# Altium PCB Digital-input.PcbDoc
Units mil, origin at the board's own origin, x right, y up, seen from the top; angles counter-clockwise.
Board outline 2505.03 x 3131.03 mil, 2 copper layers (Top Layer, Bottom Layer); 51 components, 56 nets, 194 pads, 20 vias.
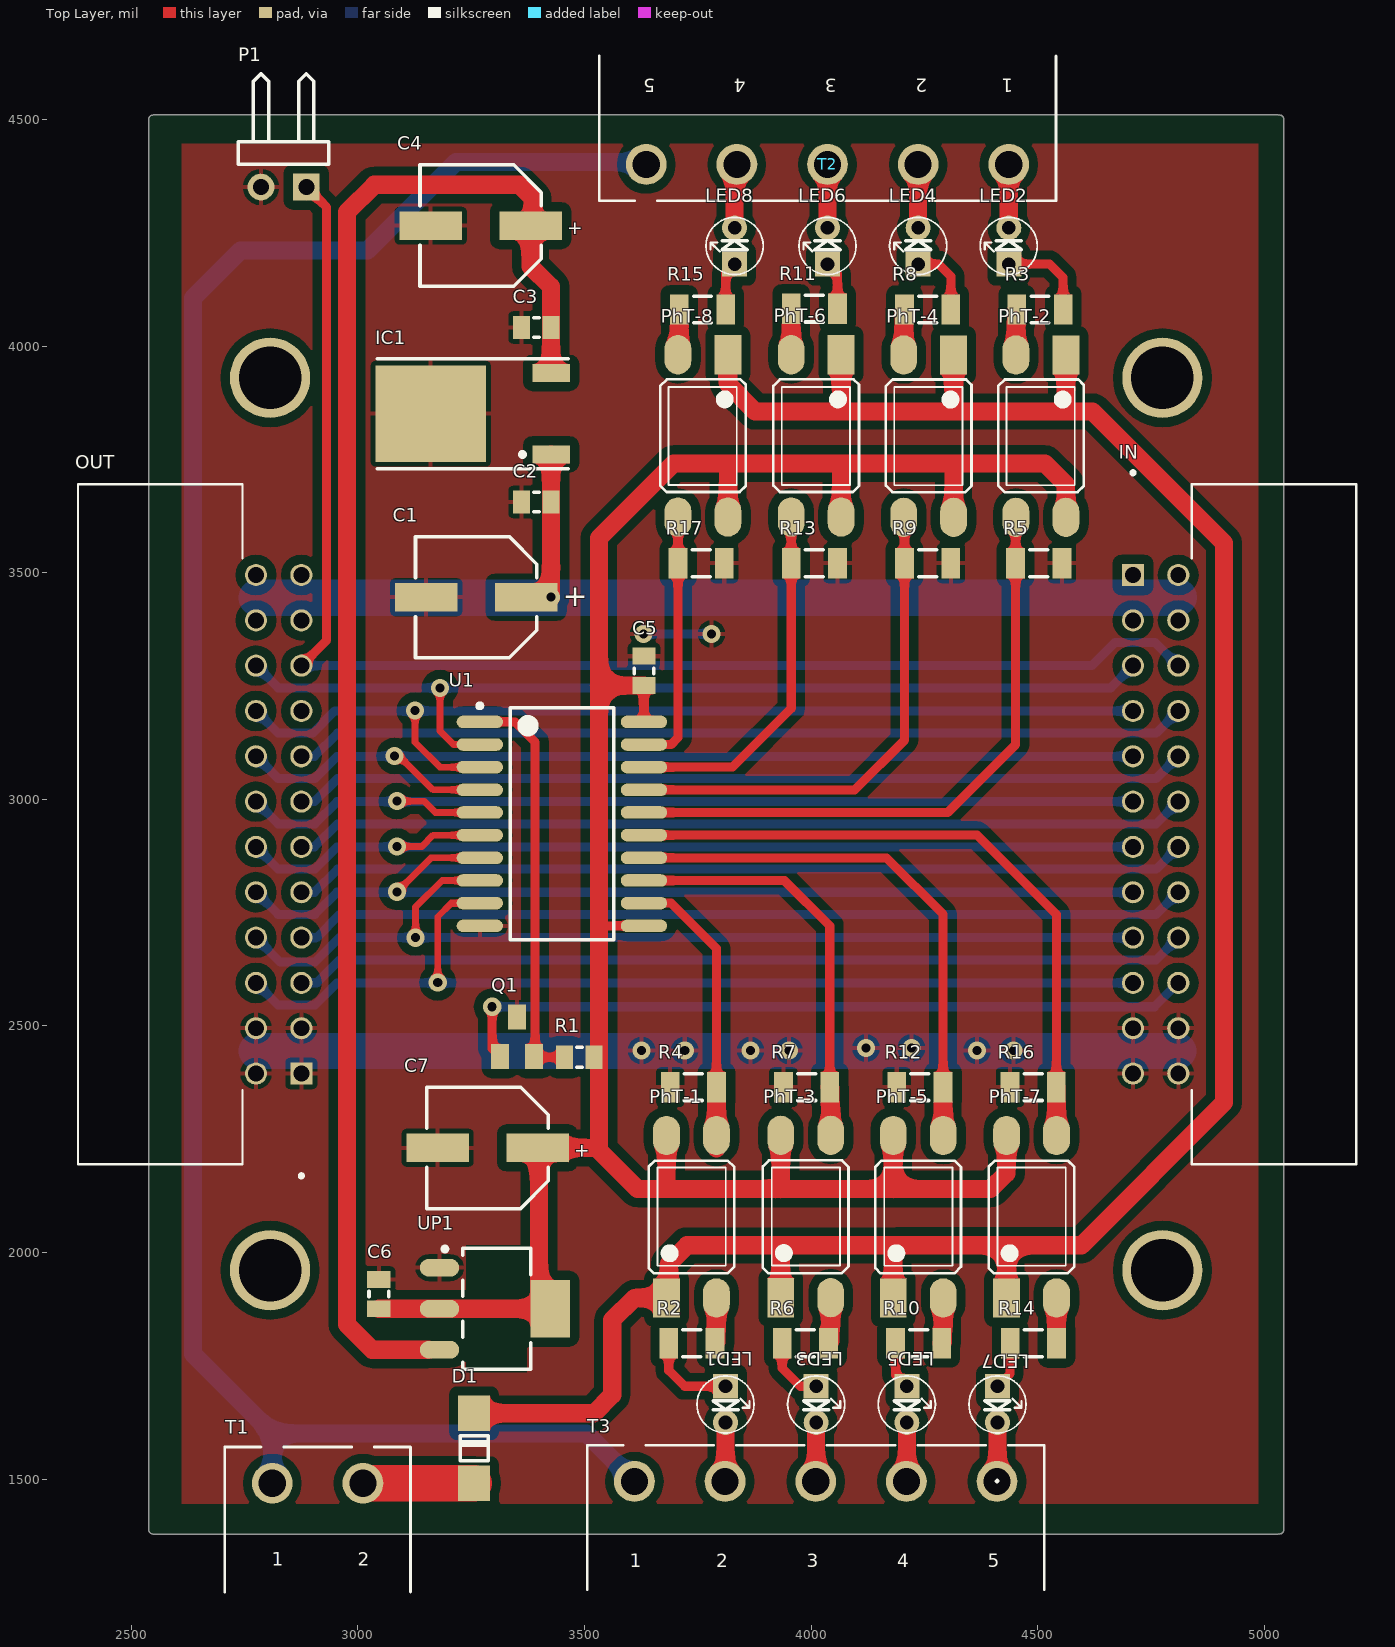
[diagram p0: Top Layer view]
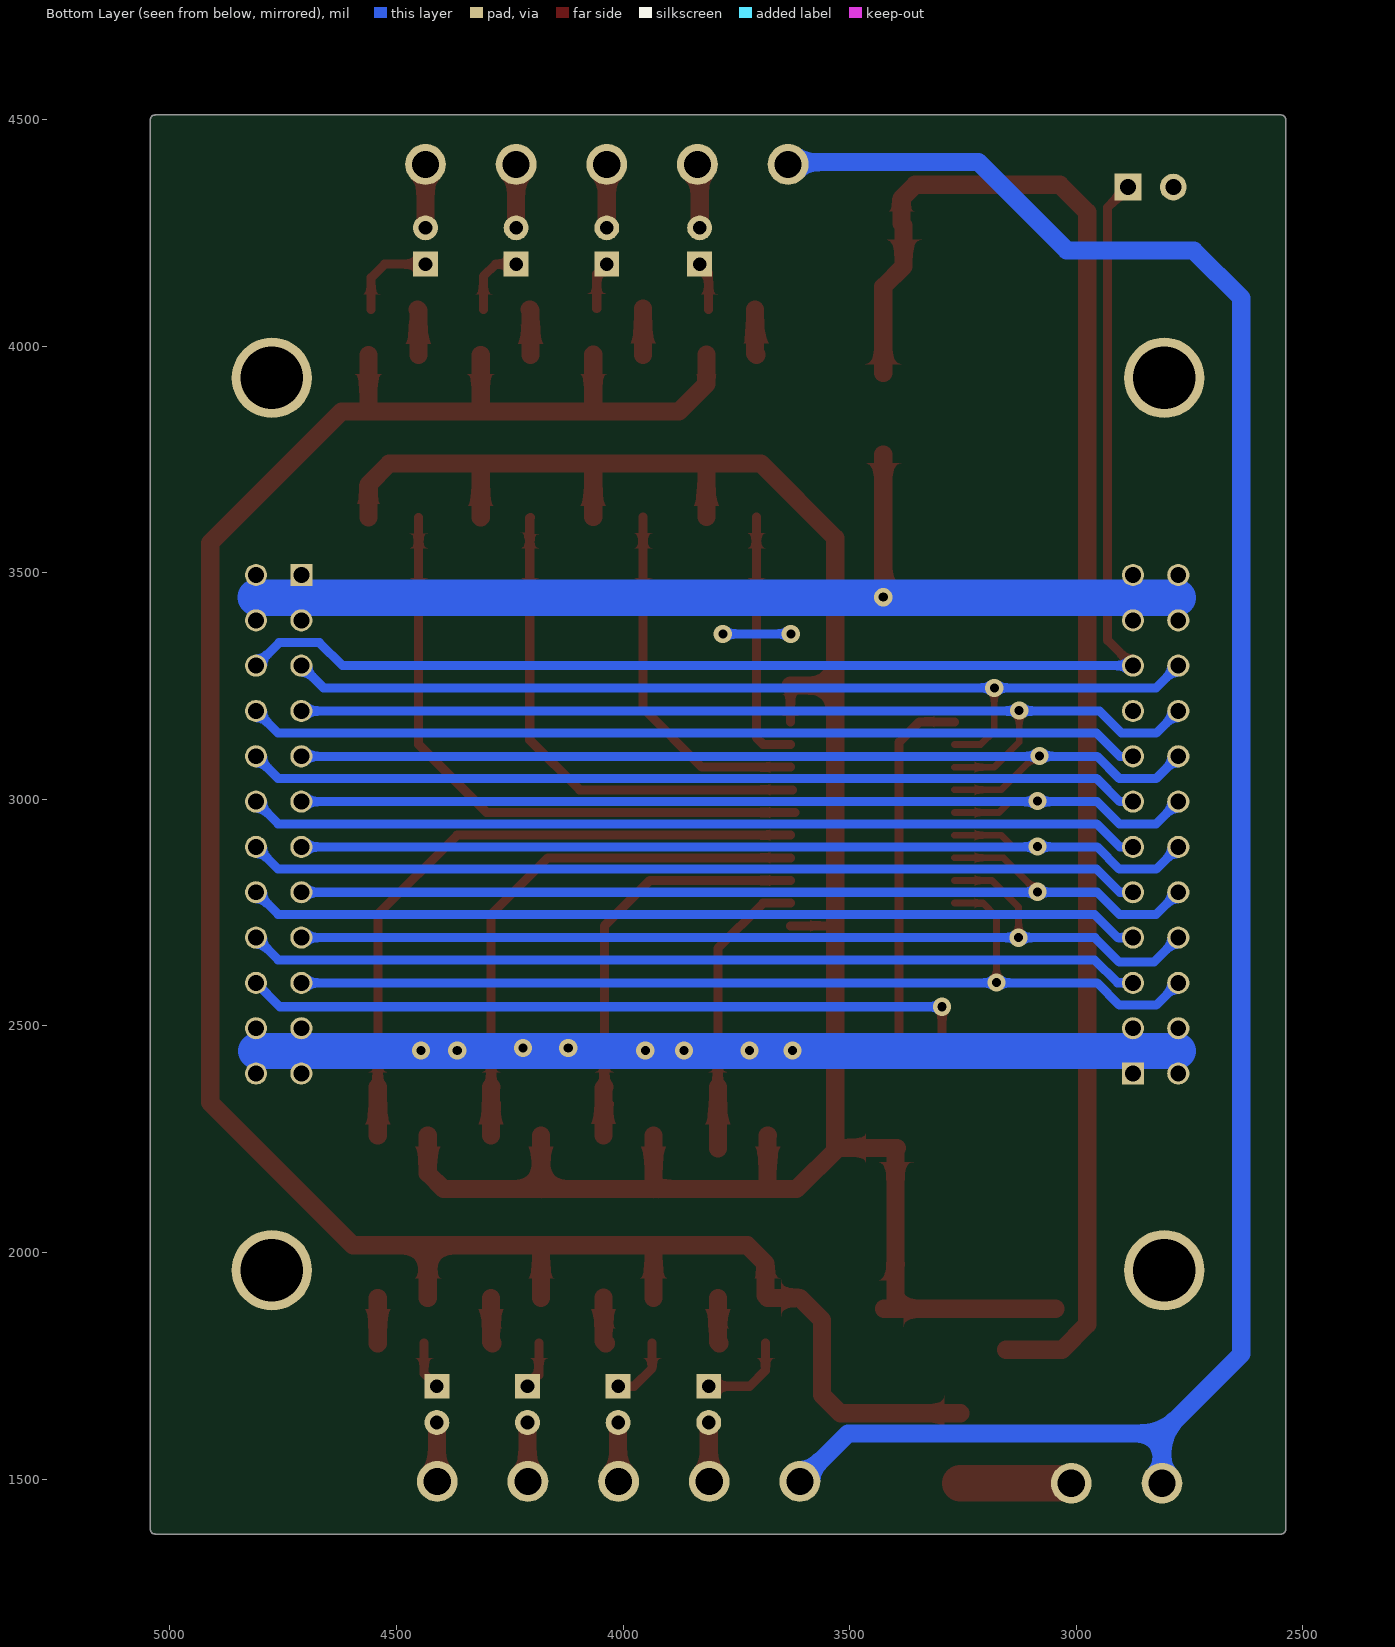
[diagram p1: Bottom Layer view, seen from below]
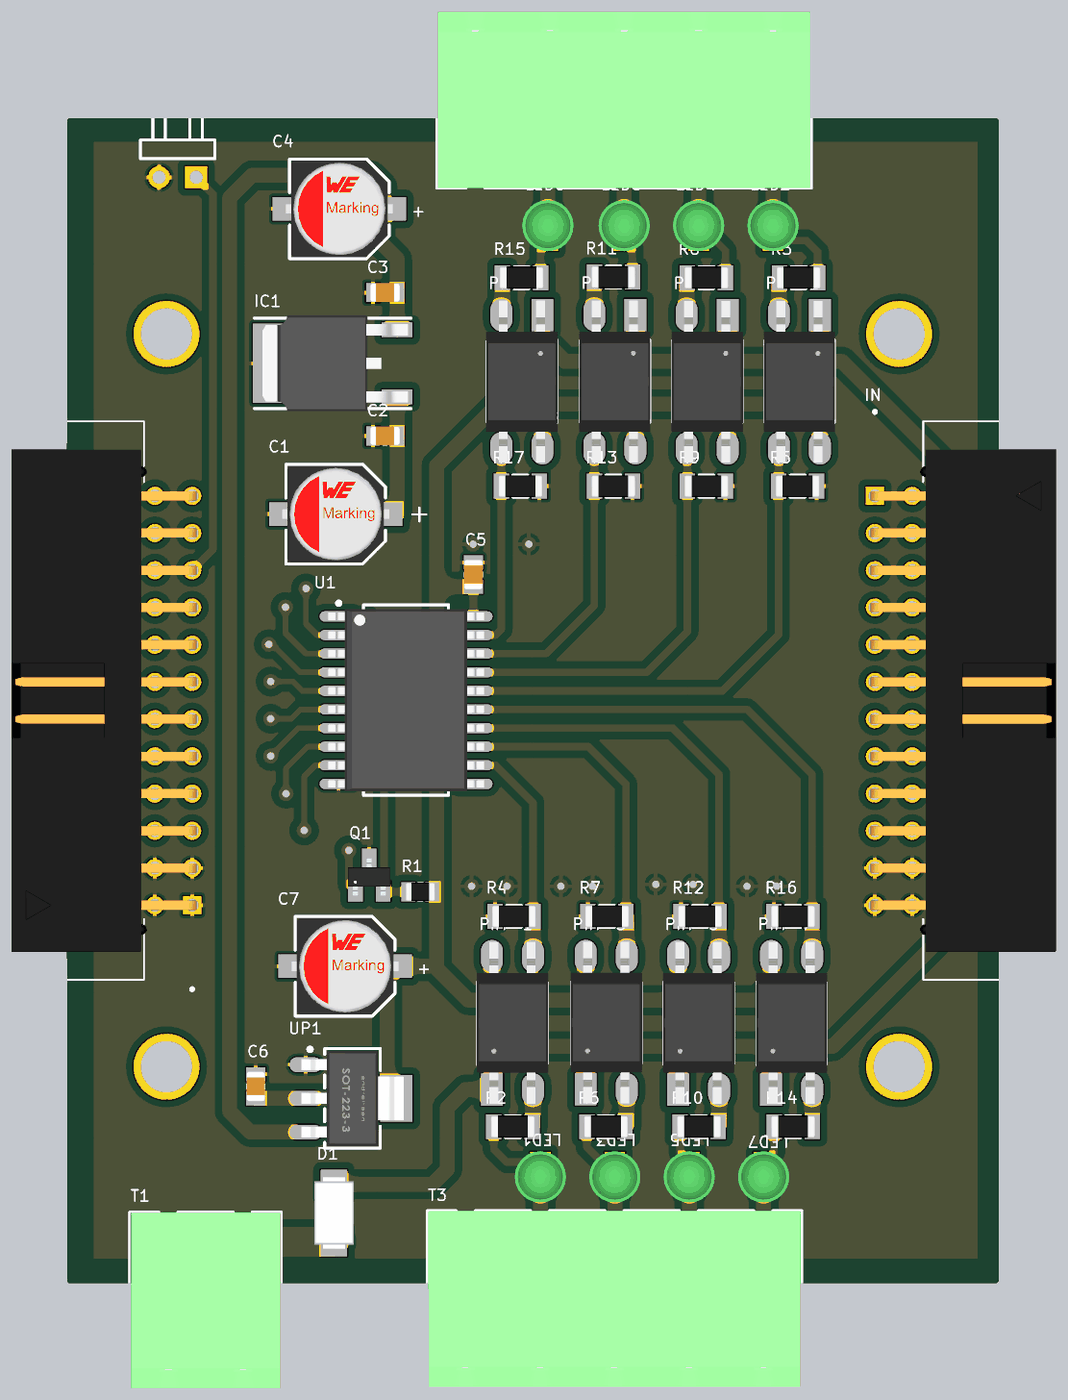
[diagram p2: 3D render of the assembled board from above, using the file's embedded part models]

## Layer stack, top to bottom
Top Solder: solder mask 0.4, Solder Resist, Dk 3.5
Top Layer: signal copper 1.4
Dielectric 1: dielectric 12.6, FR-4, Dk 4.8
Bottom Layer: signal copper 1.4
Bottom Solder: solder mask 0.4, Solder Resist, Dk 3.5

## Board outline
2537.99,1389 ccw(c2548,1389) 2548,1378.98 5030,1378.98 ccw(c5030,1389) 5031.5,1379.1 ccw(c5033,1389) 5043.02,1389 5043.02,4500 ccw(c5033,4500) 5031.5,4509.9 ccw(c5030,4500) 5030,4510.02 2548,4510.02 ccw(c2548,4500) 2537.99,4500

## Design rules (kind name [scope] priority, off if disabled: settings)
Clearance [All] p1: gap=10 ignorepadtopadclearanceinfootprint=FALSE except(0: Arc-Hole Track-Hole SMDPad-Hole THPad-Hole Via-Hole Fill-Hole Poly-Hole Region-Hole Text-Hole; 20: Arc-Poly Track-Poly SMDPad-Poly THPad-Poly Via-Poly Fill-Poly Poly-Poly)
PolygonConnect [All] p1: connectstyle=Relief reliefconductorwidth=10 reliefentries=4 polygonreliefangle="90 Angle" airgapwidth=10
RoutingVias [All] p1: holewidth=28 width=50 viastyle="Through Hole" minholewidth=20 minwidth=40 maxholewidth=28 maxwidth=50
SolderMaskExpansion [All] p1: expansion=4
Width [All] p1: maxlimit=100 minlimit=15 preferedwidth=20
30 further rules are at their usual default settings.

## Components (designator, comment, footprint, x,y, rotation, side; value= is the part's Value field where it differs from the comment)
C1 "10uF,50V" WCAP-AS5H_6.3x7.7 3260.76,3446 r0 top
C2 "100nF" SMD_CAP_0805 3361.04,3656 r0 top
C3 "100nF" SMD_CAP_0805 3361.04,4041 r0 top
C4 "220uF,16V" WCAP-AS5H_6.3x7.7 3270.76,4266 r0 top
C5 "100nF" SMD_CAP_0805 3631,3315.96 r270 top
C6 "100nF" SMD_CAP_0805 3046,1940.96 r270 top
C7 "220uF,16V" WCAP-AS5H_6.3x7.7 3286,2231 r0 top
D1 "1n5822" "Diode 1N4007 SMD" 3256,1491 r90 top
IC1 "L78M05" TO-252 3293.13,3850.96 r90 top
IN "2-1761605-8" TE_2-1761605-8 4710,3495 r270 top locked
LED1 "Red" LED-3mm 3811,1665 r270 top
LED2 "Red" LED-3mm 4436,4221 r90 top
LED3 "Red" LED-3mm 4011,1665 r270 top
LED4 "Red" LED-3mm 4236,4221 r90 top
LED5 "Red" LED-3mm 4211,1665 r270 top
LED6 "Red" LED-3mm 4036,4221 r90 top
LED7 "Red" LED-3mm 4411,1665 r270 top
LED8 "Red" LED-3mm 3831,4221 r90 top
OUT "2-1761605-8" TE_2-1761605-8 2875,2395 r90 top locked
P1 "Header 2H" HDR1X2H 2886,4351 r180 top
PhT-1 "TLP521-1" PCBComponent_1 3758.99,2054.6 r90 top
PhT-2 "TLP521-1" PCBComponent_1 4483.8,3826 r270 top
PhT-3 "TLP521-1" PCBComponent_1 4011,2055 r90 top
PhT-4 "TLP521-1" PCBComponent_1 4236,3826 r270 top
PhT-5 "TLP521-1" PCBComponent_1 4259.23,2054.6 r90 top
PhT-6 "TLP521-1" PCBComponent_1 3987.77,3826.39 r270 top
PhT-7 "TLP521-1" PCBComponent_1 4509.23,2054.6 r90 top
PhT-8 "TLP521-1" PCBComponent_1 3738.01,3826.39 r270 top
Q1 "2N7002" *SOT23 3351,2476 r0 top
R1 "2.2K" "RES 0805 (2012X06L)" 3521,2431 r180 top
R2 "2.2 K" "RES 1206 (3216X08L)" 3787.97,1800 r180 top value=1K
R3 "2.2 K" "RES 1206 (3216X08L)" 4453.8,4081 r0 top value=1K
R4 "2.2k" "RES 1206 (3216X08L)" 3791,2365 r180 top value=1K
R5 "2.2k" "RES 1206 (3216X08L)" 4451,3521 r0 top value=1K
R6 "2.2 K" "RES 1206 (3216X08L)" 4038.2,1800 r180 top value=1K
R7 "2.2k" "RES 1206 (3216X08L)" 4041,2365 r180 top value=1K
R8 "2.2 K" "RES 1206 (3216X08L)" 4206,4081 r0 top value=1K
R9 "2.2k" "RES 1206 (3216X08L)" 4206,3521 r0 top value=1K
R10 "2.2 K" "RES 1206 (3216X08L)" 4288.2,1800 r180 top value=1K
R11 "2.2 K" "RES 1206 (3216X08L)" 3956,4082.73 r0 top value=1K
R12 "2.2k" "RES 1206 (3216X08L)" 4291,2365 r180 top value=1K
R13 "2.2k" "RES 1206 (3216X08L)" 3956,3521 r0 top value=1K
R14 "2.2 K" "RES 1206 (3216X08L)" 4541.24,1800 r180 top value=1K
R15 "2.2 K" "RES 1206 (3216X08L)" 3709.03,4081 r0 top value=1K
R16 "2.2k" "RES 1206 (3216X08L)" 4541,2365 r180 top value=1K
R17 "2.2k" "RES 1206 (3216X08L)" 3706,3521 r0 top value=1K
T1 "PHOENIX" "MSTB 2,5/2-G-5,08" 2911,1491 r0 top
T2 "PHOENIX" "MSTB 2,5/5-G-5,08" 4036,4401 r180 top locked
T3 "PHOENIX" "MSTB 2,5/5-G-5,08" 4010,1495 r0 top locked
U1 "74573" SO20_M 3449.9,2946 r0 top
UP1 "3V3" SOT223 3306,1876 r0 top

## Footprints (in the part's own frame and the unit in brackets; to place one, negate y for a bottom-side part, rotate by r counter-clockwise, add the part's x,y. Pads: shape width x height; smd on the part's side, far side on the other; paste and mask are expansions set on the pad)
*SOT23 [mm]
  rect 1x1.4 smd: 1(-0.95,-1.1) 2(0.95,-1.1) 3(0,1.1)
  body extent -1.45,-1.43 1.45,1.17, height 1
"Diode 1N4007 SMD" [mm] "DO-214AC 1N4001-4007"
  rect 2x1.8 smd: 1(0,0) 2(3.92,0)
  silkscreen extent 1.27,-0.81 2.67,0.83, body extent -0.54,-1.36 4.46,1.34, height 2.16
HDR1X2H [mm] "Connector; Header; 2 Position; Right Angle"
  rect 1.5x1.5 hole 0.9: 1(0,0)
  round 1.5 hole 0.9: 2(2.54,0)
  silkscreen extent -1.27,-6.35 3.81,-1.27
LED-3mm [mil]
  rect 55x55 hole 30: 1(-40,0)
  round 55 hole 30: 2(40,0)
  silkscreen extent -63,-63 63,63, body extent -69,-69 69,69, height 154
"MSTB 2,5/2-G-5,08" [mil] "Header, Nominal current: 12 A Rated voltage (III/2): 320 V Number of positions: 2 Pitch: 5.08 mm Color: green Contact surface: Tin Assembly: Soldering DESIGNER:ABBAS BASEREH"
  round 90 hole 60: 1(-100,0) 2(100,0)
  silkscreen extent -205,-240 205,80, body extent -199,-394 201,79, height 340
"MSTB 2,5/5-G-5,08" [mil] "Header, Nominal current: 12 A Rated voltage (III/2): 320 V Number of positions: 5 Pitch: 5,08 mm Color: green Contact surface: Tin Assembly: Soldering  DESIGNER ABBAS BASEREH"
  round 90 hole 60: 1(-400,0) 2(-200,0) 3(0,0) 4(200,0) 5(400,0)
  silkscreen extent -504,-239 504,80, body extent -500,-394 500,79, height 339
PCBComponent_1 [mm]
  rect 2.2x1.5 smd: 1(-3.927,1.987)
  oval 2.2x1.5 smd: 2(-3.927,-0.813) 3(5.173,-0.813) 4(5.173,1.987)
  silkscreen extent -2.55,-1.81 3.77,2.99, body extent -4.9,-1.85 6.15,3.03, height 4.6
"RES 0805 (2012X06L)" [mm] "Chip Resistor, 2-Leads, Body 2.0x1.3mm, IPC High Density _ (0.100 W)"
  rect 0.95x1.3 smd: 1(0,0) 2(1.65,0)
  silkscreen extent 0.67,-0.55 0.97,0.55, body extent -0.19,-0.63 1.84,0.64, height 0.6
"RES 1206 (3216X08L)" [mm] "Chip Resistor, 2-Leads, Body 3.2x1.6mm, IPC High Density _ (0.125 W)"
  rect 1.05x1.7 smd: 1(0,0) 2(2.596,0)
  silkscreen extent 0.8,-0.75 1.8,0.75, body extent -0.23,-0.76 2.82,0.76, height 0.6
SMD_CAP_0805 [mm]
  rect 0.95x1.3 smd: 1(0,0) 2(1.65,0)
  silkscreen extent 0.67,-0.55 0.97,0.55, body extent -0.19,-0.63 1.84,0.63, height 0.65
SO20_M [mm] "SOIC, 20-Leads, Body 12.8x7.5mm, Pitch 1.27mm, IPC Low Density"
  oval 2.6x0.7 smd: 1(-4.6,5.715) 2(-4.6,4.445) 3(-4.6,3.175) 4(-4.6,1.905) 5(-4.6,0.635) 6(-4.6,-0.635) 7(-4.6,-1.905) 8(-4.6,-3.175) 9(-4.6,-4.445) 10(-4.6,-5.715) 11(4.6,-5.715) 12(4.6,-4.445) 13(4.6,-3.175) 14(4.6,-1.905) 15(4.6,-0.635) 16(4.6,0.635) 17(4.6,1.905) 18(4.6,3.175) 19(4.6,4.445) 20(4.6,5.715)
  silkscreen extent -4.72,-6.5 2.9,6.74, body extent -5.32,-6.22 5.32,6.22, height 1.7
SOT223 [mm] "SOT223, 4-Leads, Body 6.5x3.5mm, Pitch 2.30mm-Designer Abbas Basereh"
  oval 2.2x1 smd: 1(-3.2,2.3) 2(-3.2,0) 3(-3.2,-2.3)
  rect 2.2x3.2 smd: 4(3,0)
  Top Layer pour cut-out: -1.7,3.556 1.7,3.556 1.7,-3.556 -1.7,-3.556
  silkscreen extent -3.02,-3.4 1.9,3.47, body extent -3.5,-3.25 3.5,3.25, height 1.7
TE_2-1761605-8 [mm]
  rect 1.24x1.24 hole 0.89: 1(0,0)
  round 1.24 hole 0.89: 2(0,2.54) 3(2.54,0) 4(2.54,2.54) 5(5.08,0) 6(5.08,2.54) 7(7.62,0) 8(7.62,2.54) 9(10.16,0) 10(10.16,2.54) 11(12.7,0) 12(12.7,2.54) 13(15.24,0) 14(15.24,2.54) 15(17.78,0) 16(17.78,2.54) 17(20.32,0) 18(20.32,2.54) 19(22.86,0) 20(22.86,2.54) 21(25.4,0) 22(25.4,2.54) 23(27.94,0) 24(27.94,2.54)
  silkscreen extent -5.83,-0.1 33.02,12.51, body extent -3.17,-0.31 31.12,12.34, height 9.37
TO-252 [mm] "D-PAK/TO-252-AA; 3 Leads (1 Cropped); Body 10.1 (inc. leads) x 6.6 mm (LxW max)"
  rect 1x2.1 smd: 1(-2.285,-3.375) 3(2.285,-3.375)
  rect 5.4x6.2 smd: 4(0,3.375)
  silkscreen extent -3.08,-4.32 3.09,6.38, body extent -3.27,-4.11 3.27,5.83, height 2.39
WCAP-AS5H_6.3x7.7 [mm] "Aluminum Electrolytic Capacitors, 6.3x7.7mm"
  rect 3.5x1.6 smd: 1(-2.8,0) 2(2.8,0)
  silkscreen extent -3.4,-3.4 3.4,3.4, body extent -3.65,-3.3 3.65,3.3, height 7.7

## Part data
C1: library part 865230653012, "WCAP-AS5H SMT Aluminum Electrolytic Capacitors, D8mm x L10.5mm, 47uF, +/-20%, 50VDC", Capacitance=47uF, Capacitance Tolerance=+/-20%, Leakage Current=23.5uA, Operating Temperature="-40 to +105degC", Rated Voltage=50VDC, Ripple Current max.=95mA, ComponentLink1Description=Manufacturer, ComponentLink1URL=http://www.we-online.de, ComponentLink2Description=Datasheet, ComponentLink2URL=https://katalog.we-online.com/pbs/datasheet/865230653012.pdf, Diameter=8mm, Dissipation Factor=12%, Endurance=5000h, Length=10.5mm, Mounting Technology=SMT, Packaging="Tape and Reel", Part Number=865230653012, Published Date="August 2019", Publisher="Wurth Elektronik", Technical Reference=ASDE105470M050DVCTEE000
C2 C3 C5 C6: library part Cap-Bipolar, "Bipolar Capacitor", Voltage=100V, Adding Date=1387/12/20, Designer="Saeid Jorablo", Organazation=ControTec
C4 C7: library part 865230345005, "WCAP-AS5H SMT Aluminum Electrolytic Capacitors, D6.3mm x L7.7mm, 100uF, +/-20%, 16VDC", Capacitance=100uF, Capacitance Tolerance=+/-20%, Leakage Current=16uA, Operating Temperature="-40 to +105degC", Rated Voltage=16VDC, Ripple Current max.=81mA, ComponentLink1Description=Manufacturer, ComponentLink1URL=http://www.we-online.de, ComponentLink2Description=Datasheet, ComponentLink2URL=https://katalog.we-online.com/pbs/datasheet/865230345005.pdf, Diameter=6.3mm, Dissipation Factor=22%, Endurance=5000h, Length=7.7mm, Mounting Technology=SMT, Packaging="Tape and Reel", Part Number=865230345005, Published Date="August 2019", Publisher="Wurth Elektronik", Technical Reference=ASDD077101M016DVCTCE000
D1: library part "1N5822 SMD", "Schottky Rectifiers", Manufacturer="ON Semiconductor/Fairchild", Data=16-12-2016, Designer="Abbas Basereh", Link=https://www.aliexpress.com/item/Free-shipping-100pcs-1n5822-sma-smd-do-214ac-Schottky-diode-ss34/32337482329.html?spm=2114.01010208.3.1.zLZDsP&ws_ab_test=searchweb0_0,searchweb201602_4_10065_10068_10084_10083_10080_10082_10081_10060_10061_10062_10056_10055_10054_10059_10099_10078_10079_427_10073_10103_10102_10096_10052_10050_10051,searchweb201603_4&btsid=6e50dc92-ac69-45bc-a19e-209af19ce602, Part. No=SS34
IC1: "Precision 500mA Regulator"
IN OUT: "IDC LOW PRO HDR 64P RA BLUE", Package=None, Availability=Unavailable, MP=2-1761605-8, Price=None
LED1 LED2 LED3 LED4 LED5 LED6 LED7 LED8: library part LED, "LED", Adding Date=1387/12/22, Color=Red, Designer="Saeid Jorablo", Organazation=ControTec, Size=3mm
P1: "Header, 2-Pin, Right Angle", LatestRevisionDate=17-Jul-2002, LatestRevisionNote="Re-released for DXP Platform.", Publisher="Altium Limited"
Q1: "Transistor NPN Mos 2N7002 SILICONIX miliampere=100 V=60 SOt23", Package="SOT-23-3 Vishay", Availability=Unavailable, MF=STMicroelectronics, MP=2N7002, Price=None, SnapEDA_Link=https://www.snapeda.com/parts/2N7002/STMicroelectronics/view-part/?ref=snap
R1: library part Resistor, "Resistor", Power="1/8 W", Tolerance=5%
R2 R3 R4 R5 R6 R7 R8 R9 R10 R11 R12 R13 R14 R15 R16 R17: library part RESISTOR, "Semiconductor Resistor", LatestRevisionDate=17-Jul-2002, LatestRevisionNote="Re-released for DXP Platform.", PackageReference=AXIAL-0.5, Published=8-Jun-2000, Publisher="Altium Limited"
T1: library part CON_Phoenix_MSTB_02, "2 Pitch: 5.08 mm Color: green Contact surface: Tin Assembly", Manufacturer="PHOENIX CONTACT", Max Current="12 A", Voltage="320 V", Category=Connector, ComponentLink1Description="Header, Nominal current: 12 A Rated voltage (III/2): 320 V Number of positions: 2 Pitch: 5.08 mm Color: green Contact surface: Tin Assembly: Soldering  DESIGNER:ABBAS BASEREH", ComponentLink2Description=Reference, Connector type="PCB Terminal Block", Designer="ABBAS BASEREH", Mounting Technology=Through-Hole, PART.NO=PHOENIX, Pin Count=2, Positions=2, Revision 1=2017-3-1, Status=Unreleased
T2 T3: library part CON_Phoenix_MSTB_05, "5 Pitch: 5.08 mm Color: green Contact surface: Tin Assembly", Manufacturer="PHOENIX CONTACT", Max Current="12 A", Voltage="320 V", Category=Connector, ComponentLink1Description="Header, Nominal current: 12 A Rated voltage (III/2): 320 V Number of positions: 5 Pitch: 5.08 mm Color: green Contact surface: Tin Assembly: Soldering  DESIGNER:ABBAS BASEREH", ComponentLink2Description=Reference, Connector type="PCB Terminal Block", Designer="ABBAS BASEREH", Mounting Technology=Through-Hole, PART.NO=PHOENIX, Pin Count=5, Positions=5, Revision 1=2017-3-1, Status=Unreleased
U1: "OCTAL D-TYPE TRANSPARENT LCH"
UP1: library part AMS1117-x.x, "x.x Volt, 800mA Low-Dropout Linear Regulator, 4-pin SOT-223", Data=16-12-2016, Designer="Ali Hafizi"

## Free pads (board coordinates)
  round 177.17 hole 137.8: 3(2806,3930) 5(4775,1961) 6(2806,1961) 6(4775,3930)

## Via types
v1: diameter 40, hole 20, Top Layer to Bottom Layer, tented both sides, 20 vias

## Nets (pads, with @x,y where several pads share a name; then routed paths per layer and width w, separated by ;. In a path a pad name is that pad's centre, name@x,y a point inside that pad or via, vN(x,y) a via of type N, cw(c..) or ccw(c..) an arc to the next point about the centre after c; other vN are vias at no path point)
24V: C1.2 C2.2 IC1.1 IN.1 IN.2 IN.3 IN.4 OUT.21 OUT.22 OUT.23 OUT.24 | length 2405.4
  Top Layer w40: C1.2 v1(3426,3446) C2.2 IC1.1
  Bottom Layer w80: 2776,3445 4810,3445 4811,3446
DGND: C1.1 C2.1 C3.1 C4.1 C5.1 C6.1 C7.1 IC1.4 IN.21 IN.22 IN.23 IN.24 OUT.1 OUT.2 OUT.3 OUT.4 P1.2 Q1.3 R4.2 R5.2 R7.2 R9.2 R12.2 R13.2 R16.2 R17.2 U1.10 UP1.1 | length 2185.4
  Bottom Layer w20: v1(3630,3365) v1(3780,3365)
  Bottom Layer w60: 4810,2445 4811,2446
  Bottom Layer w80: 2776,2445 4810,2445
  other v1: 3626,2446 3721,2446 3866,2446 3951,2446 4366,2446 4446,2446 4121,2451 4221,2451
DI1: PhT-1.3 R4.1 U1.12 | length 646.4
  Top Layer w20: U1.12 3691,2771 3791,2671 R4.1@3791,2361
  Top Layer w40: PhT-1.3@3791,2230 PhT-1.3 R4.1
DI2: PhT-3.3 R7.1 U1.13 | length 918.6
  Top Layer w20: U1.13 3941,2821 4041,2721 R7.1@4041,2361
  Top Layer w40: R7.1 4043.01,2362.99 PhT-3.3
DI3: PhT-5.3 R12.1 U1.14 | length 1203.6
  Top Layer w20: U1.14 4166,2871 4291,2746 R12.1@4291,2361
  Top Layer w40: R12.1 4291.24,2364.76 PhT-5.3
DI4: PhT-7.3 R16.1 U1.15 | length 1474.3
  Top Layer w20: U1.15 4366,2921 4541,2746 R16.1@4541,2361
  Top Layer w40: R16.1 4541.24,2364.76 PhT-7.3
DI5: PhT-2.3 R5.1 U1.16 | length 1393.8
  Top Layer w20: U1.16@3621,2971 4301,2971 4451,3121 R5.1 4451,3621.55 PhT-2.3
DI6: PhT-4.3 R9.1 U1.17 | length 1117.7
  Top Layer w20: U1.17@3626,3021 4096,3021 4206,3131 4206,3620.33 PhT-4.3
DI7: PhT-6.3 R13.1 U1.18 | length 800.7
  Top Layer w20: U1.18 3826,3071 3956,3201 R13.1 3956,3622.5 PhT-6.3
DI8: PhT-8.3 R17.1 U1.19 | length 567.9
  Top Layer w20: U1.19 3691,3121 3706,3136 R17.1 PhT-8.3
DIO-A0: IN.20 Q1.1 | length 1652.6
  Top Layer w20: v1(3296.16,2542.4) 3296.16,2450.13 Q1.1
  Bottom Layer w20: v1(3296.16,2542.4) 4614.45,2542.4 4757.4,2542.4 IN.20
DIO-A1: IN.18 OUT.5 | length 1976.4
  Bottom Layer w20: OUT.5 2909,2595 2960,2646 4761,2646 IN.18
DIO-A2: IN.16 OUT.7 | length 1976.4
  Bottom Layer w20: OUT.7 2909,2695 2960,2746 4761,2746 IN.16
DIO-A3: IN.14 OUT.9 | length 1976.4
  Bottom Layer w20: OUT.9 2904,2795 2955,2846 4761,2846 IN.14
DIO-A4: IN.12 OUT.11 | length 1976.4
  Bottom Layer w20: OUT.11 2904,2895 2955,2946 4761,2946 IN.12
DIO-A5: IN.10 OUT.13 | length 1976.4
  Bottom Layer w20: OUT.13 2904,2995 2955,3046 4761,3046 IN.10
DIO-A6: IN.8 OUT.15 | length 1976.4
  Bottom Layer w20: OUT.15 2904,3095 2955,3146 4761,3146 IN.8
DIO-A7: IN.6 OUT.19 P1.1 | length 3075.1
  Top Layer w20: OUT.19 2931,3351 2931,4306 P1.1
  Bottom Layer w20: OUT.19 4619,3295 4670,3346 4759,3346 IN.6
DIO-D0: IN.19 OUT.6 U1.9 | length 2225.8
  Top Layer w15: v1(3176,2596) 3176,2741 3206,2771 U1.9
  Bottom Layer w20: OUT.6 2824,2546 2905,2546 2954,2595 IN.19
DIO-D1: IN.17 OUT.8 U1.8 | length 2213.1
  Top Layer w15: v1(3127.25,2694.75) 3127.25,2762.25 3186,2821 U1.8
  Bottom Layer w20: OUT.8 2829,2641 2905,2641 2959,2695 IN.17
DIO-D2: IN.15 OUT.10 U1.7 | length 2189.5
  Top Layer w15: v1(3086,2796) 3161,2871 U1.7
  Bottom Layer w20: OUT.10 2824,2746 2905,2746 2954,2795 IN.15
DIO-D3: IN.13 OUT.12 U1.6 | length 2168.7
  Top Layer w15: v1(3086,2896) 3141,2896 3166,2921 U1.6
  Bottom Layer w20: OUT.12 2824,2846 2905,2846 2954,2895 IN.13
DIO-D4: IN.11 OUT.14 U1.5 | length 2168.7
  Top Layer w15: v1(3086,2996) 3145.64,2996 3170.64,2971 U1.5
  Bottom Layer w20: OUT.14 2824,2946 2905,2946 2954,2995 IN.11
DIO-D5: IN.9 OUT.16 U1.4 | length 2194.5
  Top Layer w15: v1(3081,3096) 3091,3096 3166,3021 U1.4
  Bottom Layer w20: OUT.16 2824,3046 2905,3046 2954,3095 IN.9
DIO-D6: IN.7 OUT.18 U1.3 | length 2211.2
  Top Layer w15: v1(3126,3196) 3126,3126 3181,3071 U1.3
  Bottom Layer w20: OUT.18 2824,3146 2900,3146 2949,3195 IN.7
DIO-D7: IN.5 OUT.20 U1.2 | length 2170.8
  Top Layer w15: v1(3181,3246) 3181,3151 3211,3121 U1.2
  Bottom Layer w20: OUT.20 2824,3246 4661,3246 IN.5
GND: T1.1 T2.5 T3.1 | length 4656.7
  Bottom Layer w40: T1.1 2811,1601 ; T3.1 3504,1601 2811,1601 ; T2.5 3631,4406 3216,4406 3021,4211 2741,4211 2636,4106 2636,1776 2811,1601
IN1: LED1.2 T3.2 | length 130.4
  Top Layer w40: T3.2 3811,1496 LED1.2
IN2: LED3.2 T3.3 | length 130.4
  Top Layer w40: T3.3 4011,1496 LED3.2
IN3: LED5.2 T3.4 | length 130.4
  Top Layer w40: T3.4 4211,1496 LED5.2
IN4: LED7.2 T3.5 | length 130.4
  Top Layer w40: T3.5 4411,1496 LED7.2
IN5: LED2.2 T2.1 | length 140
  Top Layer w40: LED2.2 T2.1
IN6: LED4.2 T2.2 | length 140
  Top Layer w40: LED4.2 T2.2
IN7: LED6.2 T2.3 | length 140
  Top Layer w40: LED6.2 T2.3
IN8: LED8.2 T2.4 | length 142.1
  Top Layer w40: LED8.2 3831,4396 T2.4
NetC3_2: C3.2 C4.2 IC1.3 UP1.3 | length 3510.1
  Top Layer w40: UP1.3@3155.02,1785.45 3031.55,1785.45 2976,1841 2976,4296 3036,4356 3356,4356 3386,4326 3386,4271 C4.2 3381,4176 3426,4131 IC1.3
NetD1_1: D1.1 T1.2 | length 245
  Top Layer w80: T1.2 D1.1
NetLED1_1: LED1.1 R2.2 | length 199.6
  Top Layer w20: R2.2 3685.76,1740.24 3721,1705 LED1.1
NetLED2_1: LED2.1 R3.2 | length 202.4
  Top Layer w20: LED2.1 4526,4181 4556,4151 R3.2
NetLED3_1: LED3.1 R6.2 | length 146.6
  Top Layer w20: R6.2 3936,1745 3976,1705 LED3.1
NetLED4_1: LED4.1 R8.2 | length 156.3
  Top Layer w20: LED4.1 4281,4181 4308.21,4153.8 R8.2
NetLED5_1: LED5.1 R10.2 | length 105.4
  Top Layer w20: R10.2 4186,1730 LED5.1
NetLED6_1: LED6.1 R11.2 | length 107.5
  Top Layer w20: LED6.1 4058.21,4158.8 R11.2
NetLED7_1: LED7.1 R14.2 | length 106.6
  Top Layer w20: LED7.1 4439.03,1733.03 R14.2
NetLED8_1: LED8.1 R15.2 | length 108.2
  Top Layer w20: R15.2 3811.24,4161.24 LED8.1
NetPhT-1_2: PhT-1.2 R2.1 | length 101.3
  Top Layer w40: R2.1 3791,1803.03 PhT-1.2
NetPhT-2_2: PhT-2.2 R3.1 | length 101.2
  Top Layer w40: PhT-2.2 4451.79,4078.99 R3.1
NetPhT-3_2: PhT-3.2 R6.1 | length 102.4
  Top Layer w40: R6.1 4043.01,1804.8 PhT-3.2
NetPhT-4_2: PhT-4.2 R8.1 | length 101.2
  Top Layer w40: PhT-4.2 4203.99,4078.99 R8.1
NetPhT-5_2: PhT-5.2 R10.1 | length 101.3
  Top Layer w40: R10.1 4291.24,1803.03 PhT-5.2
NetPhT-6_2: PhT-6.2 R11.1 | length 101.8
  Top Layer w40: PhT-6.2 3956,3981.24 R11.1
NetPhT-7_2: PhT-7.2 R14.1 | length 100
  Top Layer w40: R14.1 PhT-7.2
NetPhT-8_2: PhT-8.2 R15.1 | length 101.3
  Top Layer w40: PhT-8.2 3709.03,3984.03 R15.1
NetQ1_2: Q1.2 R1.2 U1.1 | length 899.9
  Top Layer w20: U1.1 3346,3171 3391,3126 3391,2432.69 3392.69,2431 R1.2
V+: D1.2 PhT-1.1 PhT-2.1 PhT-3.1 PhT-4.1 PhT-5.1 PhT-6.1 PhT-7.1 PhT-8.1 | length 5346.4
  Top Layer w40: D1.2 3520.33,1645.33 3561,1686 3561,1851 3610,1900 PhT-1.1 3686,1905.24 3686,1976 3726,2016 3936,2016 ; PhT-8.1 3816.24,3916.24 3876.48,3856 4071,3856 ; PhT-3.1 3932.77,2012.77 3936,2016 ; PhT-6.1 4066,3861 4071,3856 ; PhT-5.1 4181,2011 4186,2016 ; PhT-4.1 4314.23,3857.77 4316,3856 ; PhT-7.1 4431,2016 ; PhT-2.1 4562.03,3859.97 4566,3856 ; 3936,2016 4186,2016 ; 4071,3856 4316,3856 ; 4186,2016 4431,2016 ; 4316,3856 4566,3856 ; 4431,2016 4596,2016 4911,2331 4911,3566 4621,3856 4566,3856
VCC: C5.2 C6.2 C7.2 PhT-1.4 PhT-2.4 PhT-3.4 PhT-4.4 PhT-5.4 PhT-6.4 PhT-7.4 PhT-8.4 R1.1 U1.11 U1.20 UP1.2 UP1.4 | length 5443.5
  Top Layer w20: 3531.88,2716 3536.88,2721 U1.11 ; U1.20 C5.2
  Top Layer w40: C6.2 UP1.2 UP1.4 ; UP1.4@3399.11,1876 3399.11,2228.13 C7.2 3526,2231 ; C5.2 3531.88,3251 ; PhT-1.4 3681,2258.5 3681,2150 ; PhT-8.4 3816.24,3740.76 3816,3741 ; 3921,2140 3932.77,2151.77 ; 3932.77,2140 PhT-3.4 ; PhT-6.4 4066,3736 4071,3741 ; PhT-5.4 4181,2140 ; PhT-4.4 4314.23,3739.23 4316,3741 ; PhT-7.4 4431,2175 4396,2140 4181,2140 ; PhT-2.4 4562.03,3694.98 4516,3741 4316,3741 ; 3526,2231 3531.88,2236.88 3531.88,2716 3531.88,3251 ; 3526,2231 3617,2140 4181,2140 ; 3531.88,3251 3531.88,3576.88 3696,3741 3816,3741 ; 3816,3741 4071,3741 ; 4071,3741 4316,3741
pads on no net: OUT.17

## Polygon pours and split planes (outlines as drawn)
DGND on Top Layer "Top Layer-GND" (solid, pour order 0): 4986,4446 2611,4446 2611,1446 4986,1446

## Silkscreen, mask and mechanical layers (free items; w line width, h text height)
Top Overlay:
  lines w10: 4410,1495 4411,1496
Bottom Solder:
  lines w15: 3305,3695 3305,4080 4293.5,4080 4293.5,3695 3305,3695
  text "Designe:MHN" at 4249.5,3990 h60
  text "DIGITAL IN V-1.0" at 4248.5,3860 h60
  text "2021/11/14" at 4248.5,3735 h60
Mechanical 1:
  lines w20: 5030,1389 2548,1389 2548,4500 5030,4500 ; 5033,1389 5033,4500

## Text inside footprints (layer, text, board x,y; h text height)
C1: Top Overlay "+" at 3451.71,3426.32 h48
C4: Top Overlay "+" at 3461.71,4246.31 h30
C7: Top Overlay "+" at 3476.94,2211.32 h30
T1: Top Overlay "1" at 2809.74,1308.52 h30; Top Overlay "2" at 2999.74,1308.52 h30
T2: Top Overlay "1" at 4446,4590.37 h30 r180; Top Overlay "2" at 4256,4590.37 h30 r180; Top Overlay "3" at 4056,4590.37 h30 r180; Top Overlay "4" at 3856,4590.37 h30 r180; Top Overlay "5" at 3656,4590.37 h30 r180
T3: Top Overlay "1" at 3600,1305.63 h30; Top Overlay "2" at 3790,1305.63 h30; Top Overlay "3" at 3990,1305.63 h30; Top Overlay "4" at 4190,1305.63 h30; Top Overlay "5" at 4390,1305.63 h30